# Altium PCB 4.2V_charge_module.PcbDoc
Units mm, origin at the board's own origin, x right, y up, seen from the top; angles counter-clockwise.
Board outline 45 x 50 mm, 2 copper layers (Top Layer, Bottom Layer); 41 components, 39 nets, 176 pads, 165 vias.
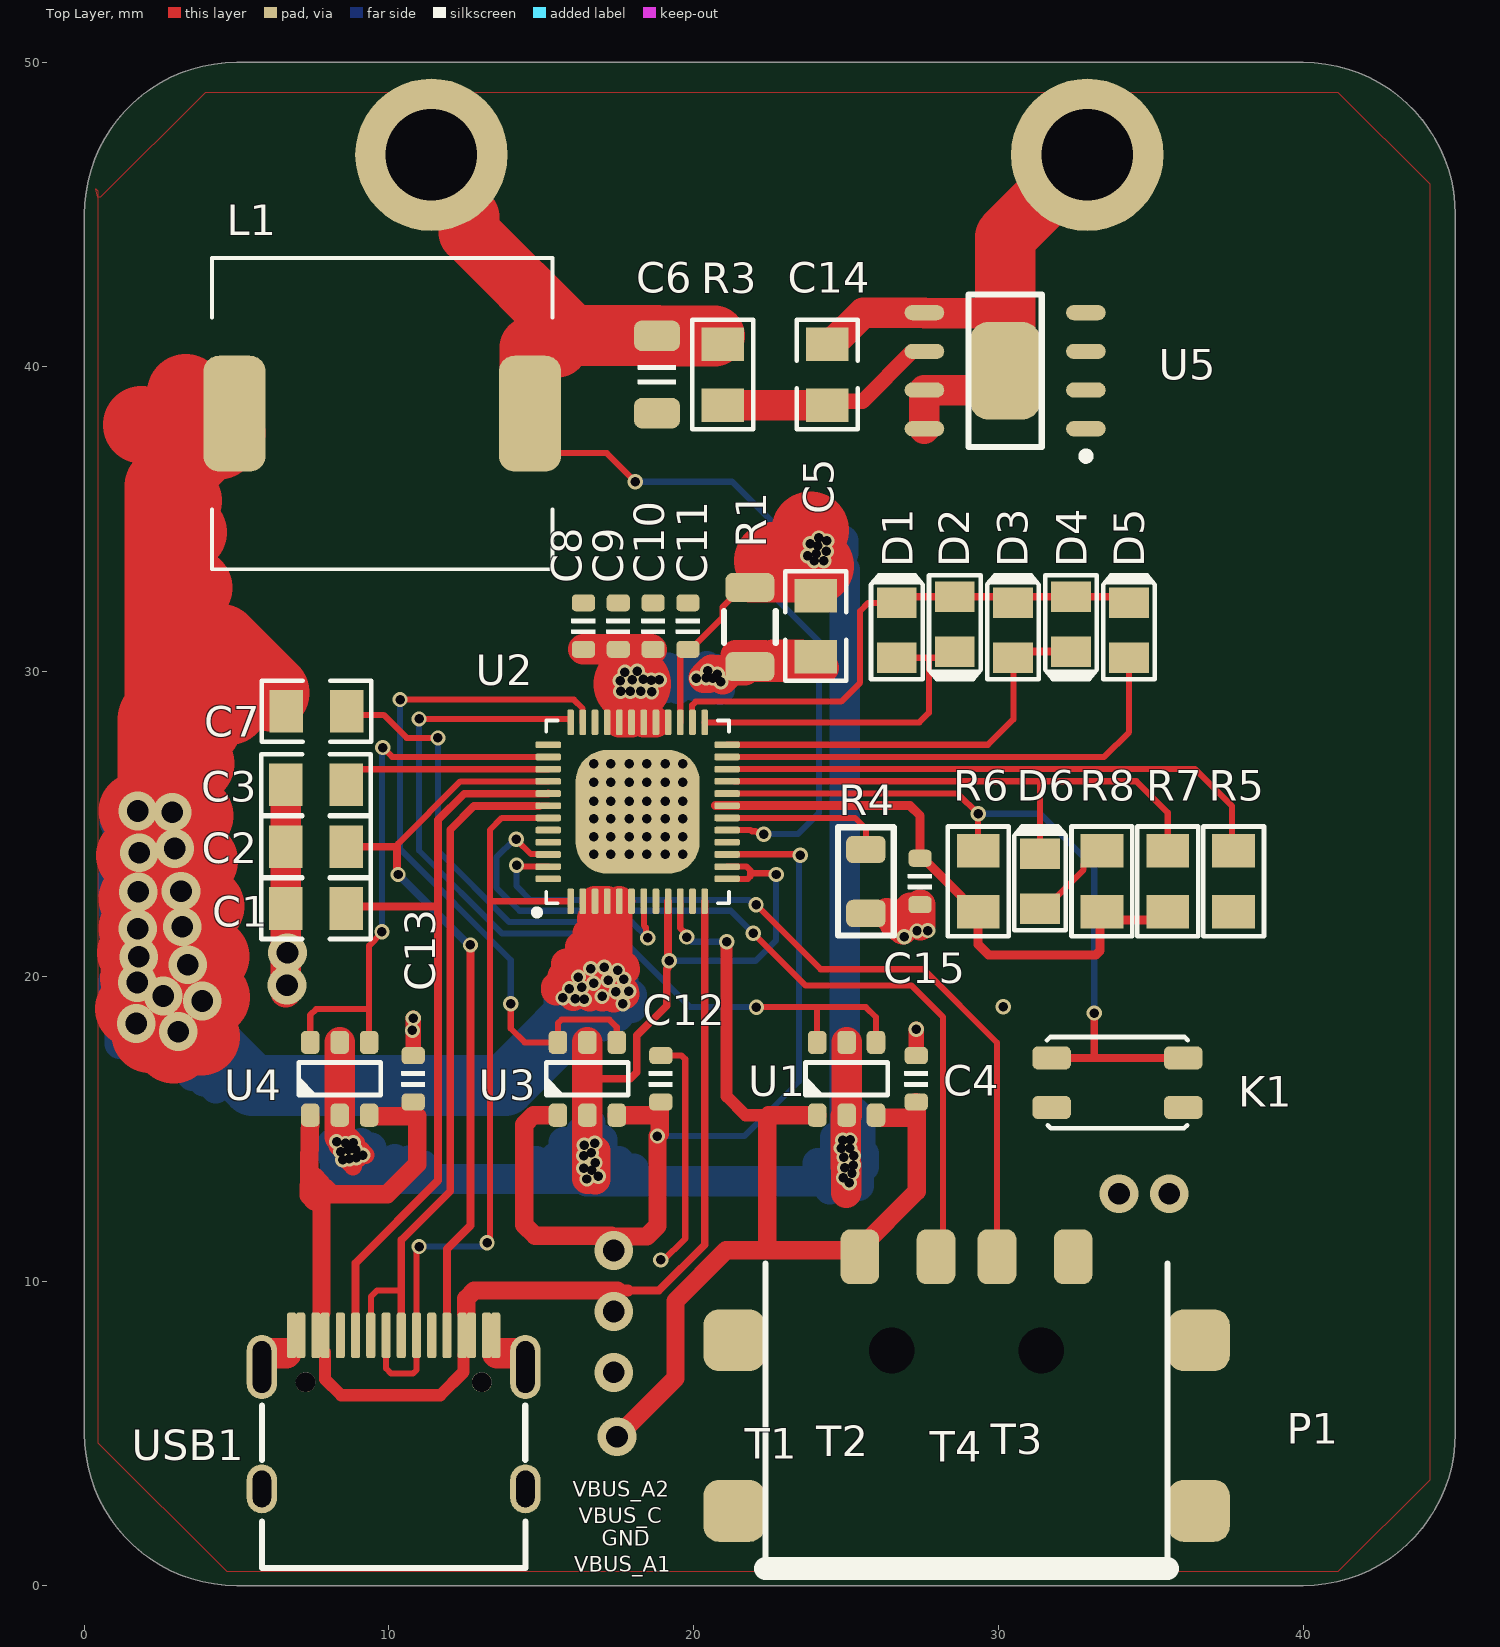
[diagram p0: Top Layer view]
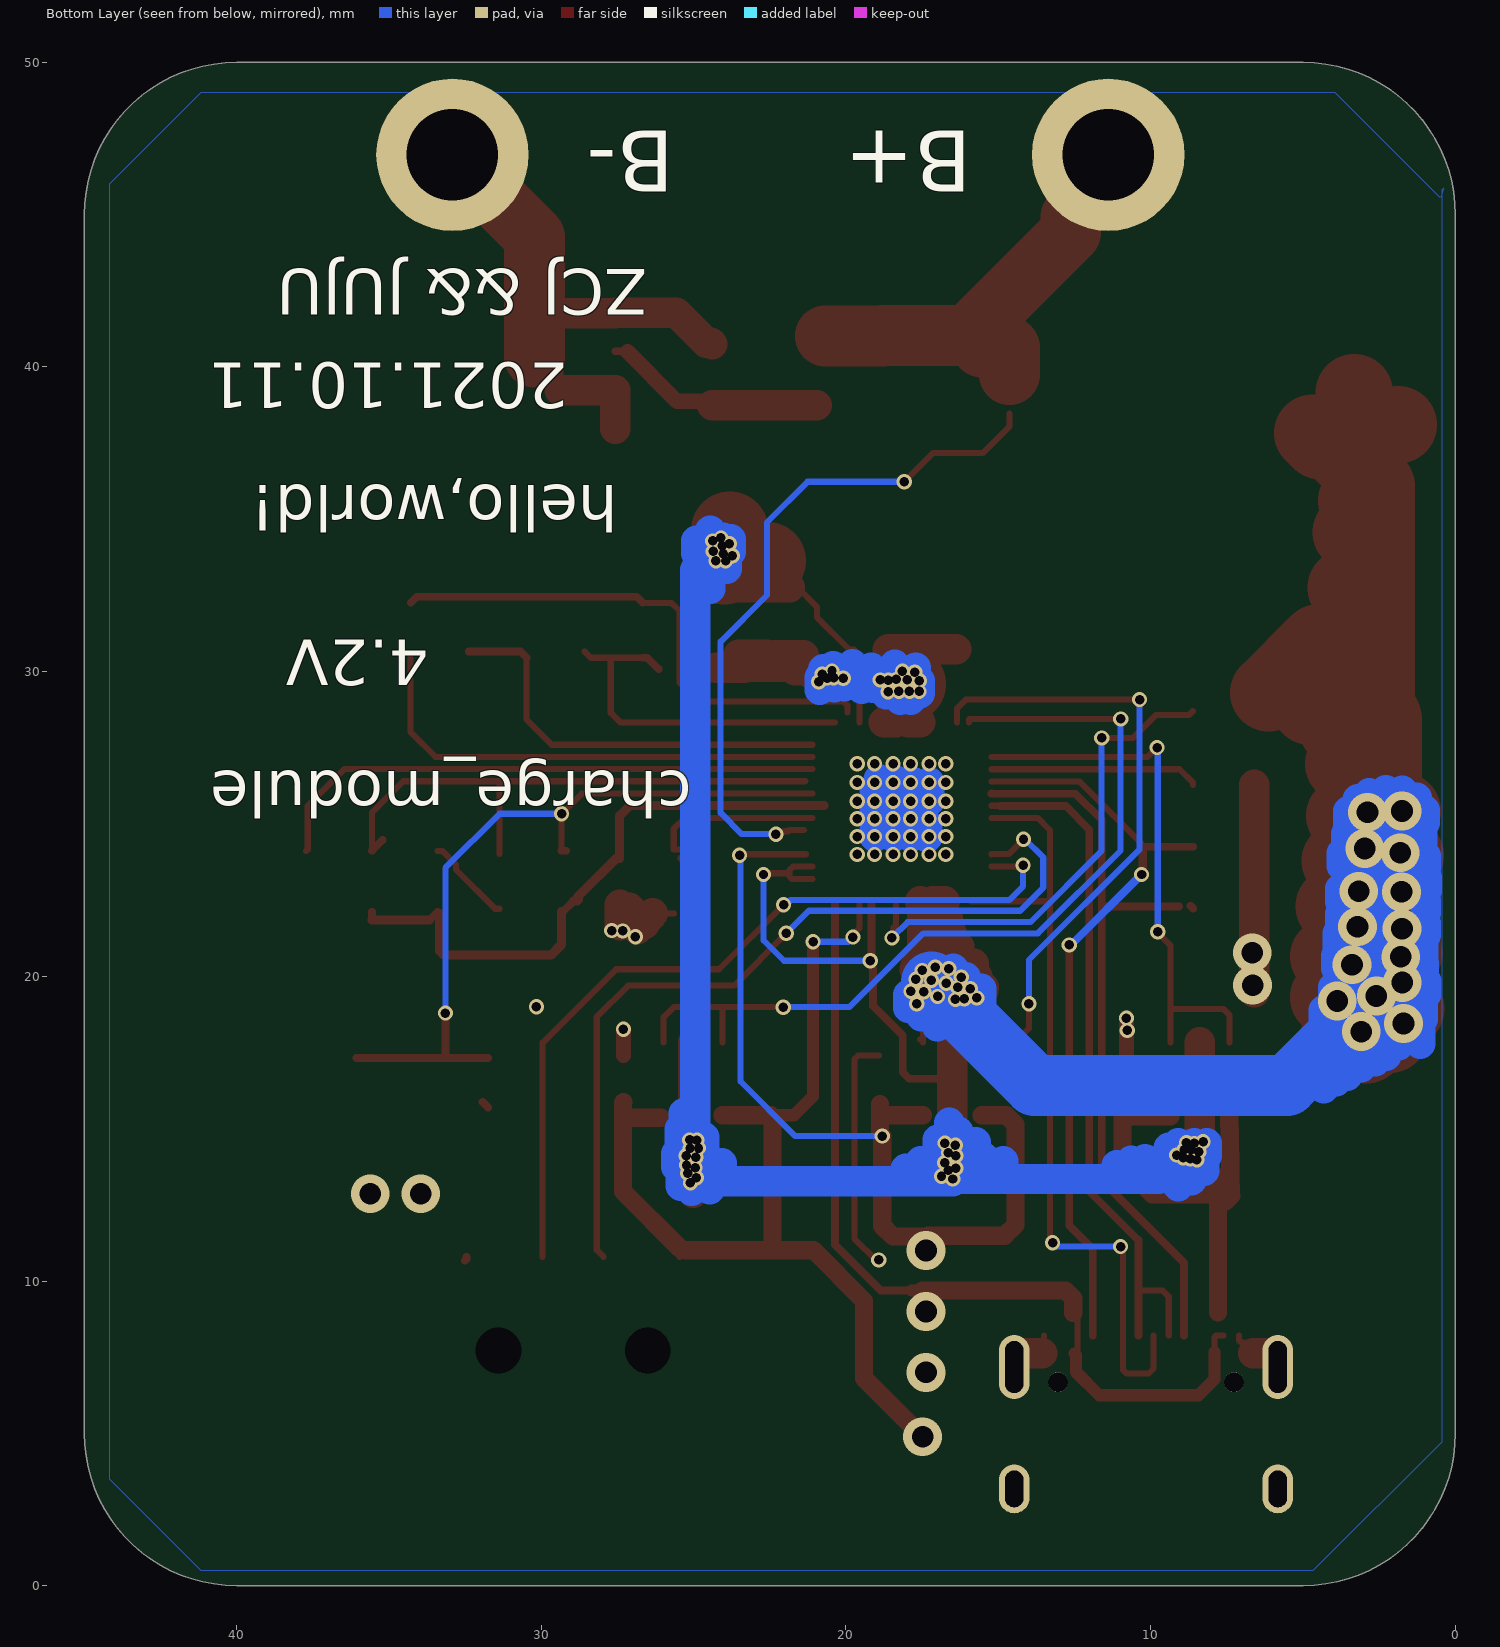
[diagram p1: Bottom Layer view, seen from below]
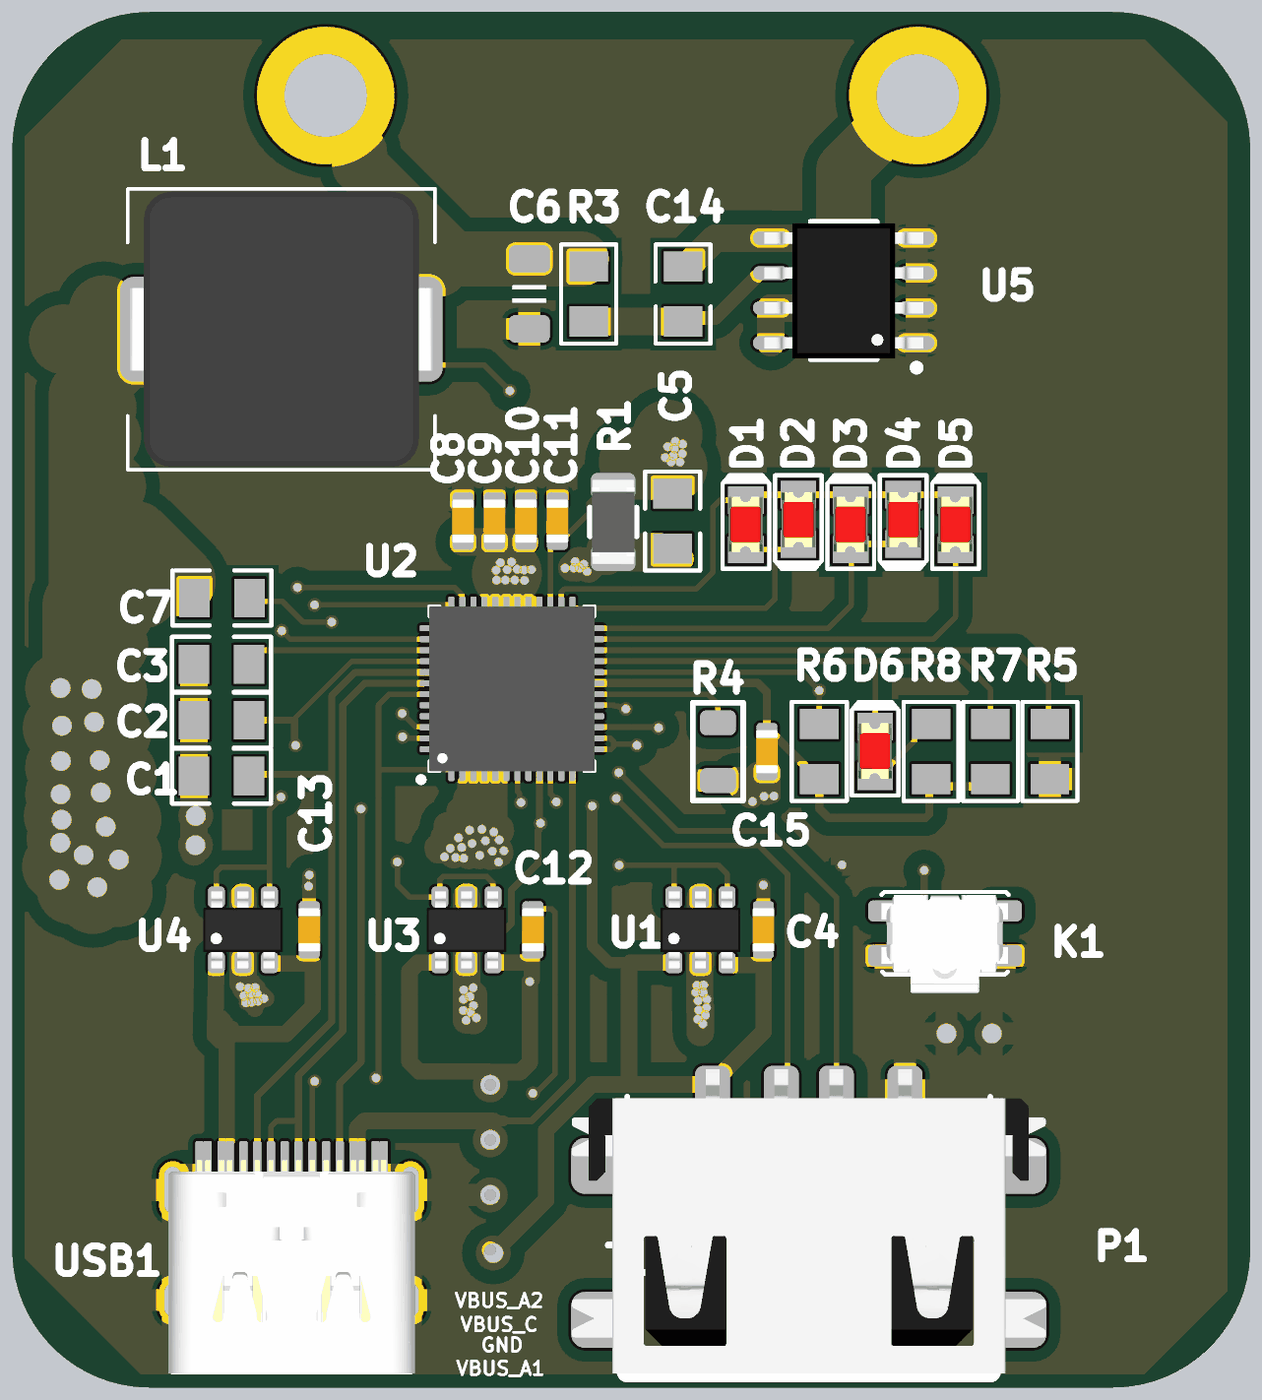
[diagram p2: 3D render of the assembled board from above, using the file's embedded part models]

## Layer stack, top to bottom
Top Solder: solder mask 0.0102, Solder Resist, Dk 3.5
Top Layer: signal copper 0.0356
Dielectric 1: dielectric 0.32, FR-4, Dk 4.8
Bottom Layer: signal copper 0.0356
Bottom Solder: solder mask 0.0102, Solder Resist, Dk 3.5

## Board outline
5,0 cw(c5,5) 0,5 0,45 cw(c5,45) 5,50 40,50 cw(c40,45) 45,45 45,5 cw(c40,5) 40,0

## Design rules (kind name [scope] priority, off if disabled: settings)
Clearance Clearance_POLY [All] p1: gap=0.15 ignorepadtopadclearanceinfootprint=FALSE except(0.5: Arc-Poly Track-Poly SMDPad-Poly THPad-Poly Via-Poly Fill-Poly Poly-Poly)
Clearance Clearance_1 [All] p2: gap=0.15 ignorepadtopadclearanceinfootprint=FALSE
PlaneClearance [All] p1: clearance=0.8
PolygonConnect [All] p1: connectstyle=Relief reliefconductorwidth=0.8 reliefentries=4 polygonreliefangle="90 Angle" airgapwidth=0.254
RoutingVias [All] p1: holewidth=0.711 width=1.27 viastyle="Through Hole" minholewidth=0.711 minwidth=1.27 maxholewidth=0.711 maxwidth=1.27
SolderMaskExpansion [All] p1: expansion=0.102 istentingtop=FALSE
Width [All] p1: maxlimit=0.254 minlimit=0.2 preferedwidth=0.2
29 further rules are at their usual default settings.

## Components (designator, comment, footprint, x,y, rotation, side; value= is the part's Value field where it differs from the comment)
C1 "300pF" 0805C 7.604,22.225 r0 top value=0.1u
C2 "300pF" 0805C 7.604,24.257 r0 top value=0.1u
C3 "300pF" 0805C 7.604,26.289 r0 top value=0.1u
C4 "10uF" 0603-CAP 27.305,16.637 r270 top value=0.1u
C5 "0.1uF" 0805C 24.003,31.496 r90 top value=0.1u
C6 "100uF/16V" 1206-CAP 18.796,39.754 r90 top value=0.1u
C7 "0.1uF" 0805C 7.62,28.702 r0 top value=0.1u
C8 "10uF" 0603-CAP 16.383,31.496 r270 top value=0.1u
C9 "10uF" 0603-CAP 17.526,31.496 r270 top value=0.1u
C10 "10uF" 0603-CAP 18.669,31.496 r270 top value=0.1u
C11 "10uF" 0603-CAP 19.812,31.496 r270 top value=0.1u
C12 "10uF" 0603-CAP 18.923,16.637 r270 top value=0.1u
C13 "10uF" 0603-CAP 10.795,16.637 r270 top value=0.1u
C14 "0.1uF" 0805C 24.384,39.751 r90 top value=0.1u
C15 "10uF" 0603-CAP 27.432,23.114 r90 top value=0.1u
D1 "color?" LED0805R 26.67,31.358 r90 top
D2 "color?" LED0805R 28.575,31.558 r270 top
D3 "color?" LED0805R 30.48,31.358 r90 top
D4 "color?" LED0805R 32.385,31.558 r270 top
D5 "color?" LED0805R 34.29,31.358 r90 top
D6 "color?" LED0805R 31.369,23.119 r90 top
K1 "TACT 4P" ButtonTACT_3.5*3.55_90 33.909,16.51 r180 top value=3.4x3.5
L1 "2.2uH" IND_1040 9.779,38.468 r180 top
P1 "USB-A" USB-Short 28.956,4.318 r270 top
R1 "5mR" 1206-RES 21.844,31.465 r90 top value=22R
R3 "1K" 0805R 20.955,39.751 r90 top value=22R
R4 "NTC" 0805-L 25.654,23.114 r90 top value=22R
R5 "20K" 0805R 37.719,23.119 r270 top value=22R
R6 "10K" 0805R 29.337,23.119 r270 top value=22R
R7 "10K" 0805R 35.56,23.119 r270 top value=22R
R8 "2K" 0805R 33.401,23.119 r270 top value=22R
T1 "测试点" TEST_PT#1 17.374,8.382 r0 top
T2 "测试点" TEST_PT#2 17.374,6.197 r0 top
T3 "测试点" TEST_PT#3 17.374,12.268 r0 top
T4 "测试点" TEST_PT#4 17.374,9.652 r0 top
U1 "UT8205A" SOT23-6 25.019,16.637 r90 top
U2 "SW6208" QFN-48_6x6 18.161,25.4 r90 top
U3 "UT8205A" SOT23-6 16.51,16.637 r90 top
U4 "UT8205A" SOT23-6 8.382,16.637 r90 top
U5 "XB8886A" SO-8-PAD 30.226,39.878 r180 top
USB1 "Type-C" Type-C-TOP 10.153,5.695 r270 top

## Footprints (in the part's own frame and the unit in brackets; to place one, negate y for a bottom-side part, rotate by r counter-clockwise, add the part's x,y. Pads: shape width x height; smd on the part's side, far side on the other; paste and mask are expansions set on the pad)
0603-CAP [mil]
  rrect50% 22x30 smd: 1(-30,0) 2(30,0)
  silkscreen extent -10,-15 10,15, body extent -31,-16 32,16, height 31
0805-L [mm]
  rrect50% 0.9x1.3 smd: 1(-1.05,0) 2(1.05,0)
  silkscreen extent -1.78,-0.91 1.78,0.91, body extent -1,-0.6 1,0.6, height 0.76
0805C [mm] "C"
  rect 1.1x1.4 smd: 1(-1,0) 2(1,0)
  silkscreen extent -1.8,-1 1.8,1, body extent -1.07,-0.7 1.08,0.7, height 1.1
0805R [mm] "R"
  rect 1.1x1.4 smd: 1(-1,0) 2(1,0)
  silkscreen extent -1.8,-1 1.8,1, body extent -1.08,-0.7 1.07,0.7, height 0.65
1206-CAP [mm]
  rrect50% 1x1.5 smd: 1(-1.27,0) 2(1.27,0)
  silkscreen extent -0.3,-0.61 0.3,0.61, body extent -1.5,-0.75 1.5,0.75, height 1.5
1206-RES [mm]
  rrect50% 0.956x1.61 smd paste+0 mask+0: 1(-1.301,0) 2(1.301,0)
  silkscreen extent -0.52,-0.85 0.52,0.85, body extent -1.55,-0.77 1.55,0.78, height 0.65
ButtonTACT_3.5*3.55_90 [mil]
  rrect50% 50x30 smd: 1(-85,32) 2(-85,-32) 3(85,32) 4(85,-32)
  silkscreen extent -91,-59 91,59, body extent -90,-55 91,85, height 56
IND_1040 [mm]
  rrect50% 2.032x3.81 smd: 1(-4.85,0) 2(4.85,0)
  silkscreen extent -5.59,-5.11 5.59,5.11, body extent -5.5,-5 5.5,5, height 3.7
LED0805R [mm]
  rect 1x1.3 smd: 1(-0.9,0) 2(0.9,0)
  silkscreen extent -1.6,-0.85 1.8,0.85, body extent -0.99,-0.62 1.03,0.64, height 1.1
QFN-48_6x6 [mm]
  rrect50% 0.84x0.22 smd: 1(-2.935,2.2) 2(-2.935,1.8) 3(-2.935,1.4) 4(-2.935,1) 5(-2.935,0.6) 6(-2.935,0.2) 7(-2.935,-0.2) 8(-2.935,-0.6) 9(-2.935,-1) 10(-2.935,-1.4) 11(-2.935,-1.8) 12(-2.935,-2.2) 25(2.935,-2.2) 26(2.935,-1.8) 27(2.935,-1.4) 28(2.935,-1) 29(2.935,-0.6) 30(2.935,-0.2) 31(2.935,0.2) 32(2.935,0.6) 33(2.935,1) 34(2.935,1.4) 35(2.935,1.8) 36(2.935,2.2)
  rrect50% 0.22x0.84 smd: 13(-2.2,-2.935) 14(-1.8,-2.935) 15(-1.4,-2.935) 16(-1,-2.935) 17(-0.6,-2.935) 18(-0.2,-2.935) 19(0.2,-2.935) 20(0.6,-2.935) 21(1,-2.935) 22(1.4,-2.935) 23(1.8,-2.935) 24(2.2,-2.935) 37(2.2,2.935) 38(1.8,2.935) 39(1.4,2.935) 40(1,2.935) 41(0.6,2.935) 42(0.2,2.935) 43(-0.2,2.935) 44(-0.6,2.935) 45(-1,2.935) 46(-1.4,2.935) 47(-1.8,2.935) 48(-2.2,2.935)
  rrect50% 4.064x4.064 smd paste-3: 49(0,0)
  silkscreen extent -3.4,-3 3,3.4, body extent -3,-3 3,3, height 0.9
SO-8-PAD [mm]
  oval 1.3x0.5 smd: 1(-2.65,1.905) 2(-2.65,0.635) 3(-2.65,-0.635) 4(-2.65,-1.905) 5(2.65,-1.905) 6(2.65,-0.635) 7(2.65,0.635) 8(2.65,1.905)
  rrect50% 2.3x3.2 smd: 9(0,0)
  silkscreen extent -2.78,-2.5 1.2,2.93, body extent -2.89,-2.44 2.89,2.46, height 1.45
SOT23-6 [mil]
  rrect50% 30x24 smd: 1(-47,38) 2(-47,0) 3(-47,-38) 4(47,-38) 5(47,0) 6(47,38)
  silkscreen extent -21,-53 21,53, body extent -55,-57 55,57, height 57
TEST_PT#1 [mil]
  rrect100% 16x16 smd: 0(0,-54.4)
TEST_PT#2 [mil]
  rrect100% 16x16 smd: 0(0,-47.14)
TEST_PT#3 [mil]
  rrect100% 16x16 smd: 0(0,-49.92)
TEST_PT#4 [mil]
  rrect100% 16x16 smd: 0(0,-25.67)
Type-C-TOP [mm]
  round 0.65 hole 0.65: 0(-0.98,2.89) 0(-0.98,-2.89)
  oval 1.6x1 hole 0.6 slot 1.2 at 0 deg: 1(2.52,4.325) 2(2.52,-4.325)
  oval 2.1x1 hole 0.6 slot 1.7 at 0 deg: 3(-1.48,-4.325) 4(-1.48,4.325)
  rrect50% 1.5x0.3 smd: A1(-2.52,-3.35) A4(-2.52,-2.55) A5(-2.52,-1.25) A6(-2.52,-0.25) A7(-2.52,0.25) A8(-2.52,1.25) A9(-2.52,2.55) A12(-2.52,3.35) B1(-2.52,3.05) B4(-2.52,2.25) B5(-2.52,1.75) B6(-2.52,0.75) B7(-2.52,-0.75) B8(-2.52,-1.75) B9(-2.52,-2.25) B12(-2.52,-3.05)
  silkscreen extent -0.22,-4.33 5.12,4.33, body extent -2.57,-4.48 5.18,4.48, height 3.26
USB-Short [mm]
  rrect50% 2.032x2.032 smd: 0(-3.738,7.625) 0(-3.738,-7.625) 0(1.862,7.625) 0(1.862,-7.625)
  rrect50% 1.8x1.27 smd: 1(-6.476,-3.5) 2(-6.476,-1) 3(-6.476,1) 4(-6.476,3.5)
  round 0.6 hole 1.5 unplated: MH1(-3.4,2.45) MH2(-3.4,-2.45)
  silkscreen extent -6.25,-6.6 3.75,6.6, body extent -7.25,-8.62 3.81,8.62, height 6.4

## Part data
C1 C2 C3 C5 C7 C14: library part 电容-0402, "Capacitor"
C4 C8 C9 C10 C11 C12 C13 C15: library part 电容-0603, "Capacitor"
C6: library part 电容-1206, "Capacitor"
D1 D2 D3 D4 D5 D6: library part LED_0402, "LED", Type=0402
K1: library part ButtonTACT, "Button", Type="TACT 4P"
L1: library part 电感-1040, "Fixed Inductors 4.7uH 30% SMD 1240", Package=None, Availability=Bad, Check_prices=https://www.snapeda.com/parts/SRR1240-4R7Y/Bourns/view-part/1646614/?ref=eda, MF=Bourns, MP=SRR1240-4R7Y, Price=None, SnapEDA_Link=https://www.snapeda.com/parts/SRR1240-4R7Y/Bourns/view-part/1646614/?ref=snap
R1: library part 电阻-1206, "Resistor"
R3 R5 R6 R7 R8: library part 电阻-0402, "Resistor"
R4: library part 电阻-0805, "Resistor"
U2: "充电宝芯片"
U5: Package="SOIC-8 Texas Instruments", Availability=Unavailable, MF="Texas Instruments", MP=NE5532D, Price=None, SnapEDA_Link=https://www.snapeda.com/parts/NE5532D/Texas%20Instruments/view-part/4299479/?ref=snap
USB1: library part USB-Type-C-TOP

## Free pads (board coordinates)
  round 5 hole 3: 2(11.392,46.965) 2(32.918,46.965)

## Via types
v1: diameter 0.5, hole 0.311, Top Layer to Bottom Layer, tented both sides, 142 vias
v2: diameter 1.27, hole 0.711, Top Layer to Bottom Layer, tented both sides, 23 vias

## Nets (pads, with @x,y where several pads share a name; then routed paths per layer and width w, separated by ;. In a path a pad name is that pad's centre, name@x,y a point inside that pad or via, vN(x,y) a via of type N, cw(c..) or ccw(c..) an arc to the next point about the centre after c; other vN are vias at no path point)
B+: C6.2 L1.1 pad.2@11.392,46.965 R3.2 U2.17 | length 40
  Top Layer w0.2: L1.1 14.629,38.056 15.514,37.171 17.147,37.171 v1(18.085,36.233) ; U2.17@21.387,24.803 21.869,24.803 21.91,24.763 22.035,24.763 22.075,24.723 22.244,24.723 v1(22.302,24.665)
  Top Layer w0.254: L1.1@13.763,39.9 13.911,39.751 13.998,39.751 L1.1@14.629,39.751 ; L1.1@13.951,40.265 14.629,40.6 ; R3.2@20.682,41.024 R3.2
  Top Layer w2: pad.2@11.392,46.965 11.392,46.153 12.624,44.921 12.624,44.419 16.015,41.028 ; L1.1@14.629,39.751 14.629,40.6 14.629,40.64 14.645,40.656 15.534,40.656 15.906,41.028 16.015,41.028 ; R3.2@20.682,41.024 C6.2 18.793,41.028 16.015,41.028
  Bottom Layer w0.2: v1(18.085,36.233) 21.26,36.233 22.593,34.9 22.593,32.512 24.117,30.988 24.117,25.362 23.421,24.665 v1(22.302,24.665)
B-: C14.2 pad.2@32.918,46.965 U5.5 U5.7 U5.8 U5.9 | length 19.2
  Top Layer w0.254: U5.5 U5.5@27.589,41.77 ; U5.9@29.398,39.242 29.398,39.838 29.439,39.878 U5.9 U5.9@30.226,40.328 ; 29.807,41.77 U5.9@30.226,41.351
  Top Layer w1: C14.2 24.434,40.801 24.584,40.801 25.566,41.783 U5.5 ; U5.8 U5.7 27.577,39.242 U5.9@29.398,39.242 ; U5.5@27.589,41.77 29.807,41.77
  Top Layer w2: U5.9@30.226,40.328 30.226,41.351 30.226,44.272 pad.2@32.918,46.965
BST: C7.2 U2.7 | length 16.4
  Top Layer w0.2: C7.2 8.739,28.583 9.822,28.583 10.579,27.826 v1(11.608,27.826) ; U2.7@18.364,22.465 18.364,21.666 18.434,21.596 18.434,21.319 v1(18.492,21.262)
  Bottom Layer w0.2: v1(11.608,27.826) 11.608,24.117 13.945,21.78 17.973,21.78 v1(18.492,21.262)
CC1: C1.2 U2.41 USB1.A5 | length 24.7
  Top Layer w0.254: C1.2 C1.2@8.693,22.314 ; USB1.A5 8.903,10.592 11.608,13.297 11.608,22.288 ; C1.2@9.068,22.288 11.608,22.288 ; U2.41 15.223,25.997 12.471,25.997 11.608,25.133 11.608,22.288
CC2: C2.2 U2.40 USB1.B5 | length 25.8
  Top Layer w0.2: v1(10.3,23.343) 10.3,23.504 10.3,24.358 12.341,26.4 U2.40
  Top Layer w0.254: C2.2 10.253,24.257 10.253,23.39 v1(10.3,23.343) ; USB1.B5 11.903,11.052 12.675,11.824 v1(12.675,21.031)
  Bottom Layer w0.254: v1(10.3,23.343) 12.611,21.031 v1(12.675,21.031)
CCL/WLED: C3.2 U2.39 | length 6.9
  Top Layer w0.2: C3.2 8.604,26.347 9.054,26.797 U2.39@15.226,26.797
DATA: U2.8
DMA1: P1.2 U2.46 | length 27.5
  Top Layer w0.2: v1@14.199,24.473 14.661,24.01 15.216,24.01 U2.46 ; v1(21.958,21.412) 23.673,19.698 27.153,19.698 28.181,18.669 28.181,11.019 P1.2
  Bottom Layer w0.2: v1(14.174,24.5) 14.124,24.5 13.525,23.901 13.525,22.911 14.283,22.154 21.217,22.154 v1(21.958,21.412)
DMA2: U2.48
DMB: U2.44
DMC: U2.42 USB1.A7 USB1.B7 | length 23.2
  Top Layer w0.2: USB1.B7 9.407,8.219 9.407,9.483 9.614,9.69 10.403,9.69 ; U2.42@14.933,25.6 U2.42
  Top Layer w0.254: USB1.A7 10.403,9.69 10.403,11.343 12.012,12.952 12.012,24.813 12.791,25.593 U2.42@14.933,25.593
DPA1: P1.3 U2.47 | length 26.7
  Top Layer w0.2: v1@14.148,23.597 14.151,23.6 U2.47 ; v1(22.047,22.352) 24.168,20.231 27.546,20.231 29.956,17.821 P1.3
  Bottom Layer w0.2: v1(14.186,23.649) 14.186,22.961 14.644,22.504 21.814,22.504 21.966,22.352 v1(22.047,22.352)
DPB: U2.45
DPC: U2.1 U2.43 USB1.A6 USB1.B6 | length 27
  Top Layer w0.2: USB1.A6 9.903,7.128 10.071,6.96 10.786,6.96 10.903,7.077 10.903,11.043 v1@11.074,11.214 ; v1(13.221,11.252) 13.31,11.341 13.31,22.465 ; U2.43 13.707,25.2 13.31,24.803 13.31,22.465 ; U2.1@15.897,22.465 13.31,22.465
  Bottom Layer w0.2: v1(10.989,11.128) 13.097,11.128 v1(13.221,11.252)
FLED/BSET/IDA2: D6.2 R7.1 U2.21 | length 18.8
  Top Layer w0.2: U2.21@21.336,26.416 21.349,26.403 31.331,26.403 ; D6.2 31.369,26.365 31.331,26.403 ; R7.1 35.56,25.375 34.531,26.403 31.331,26.403
  Top Layer w0.254: R7.1@35.201,24.478 R7.1
GATE_A1: U1.4 U1.6 U2.36 | length 28.6
  Top Layer w0.2: v1(10.986,28.448) 15.938,28.448 15.961,28.425 U2.36 ; v1@22.125,18.988 24.092,18.988 ; U1.6 24.054,18.95 24.092,18.988 ; U1.4 25.984,18.656 25.652,18.988 24.092,18.988
  Bottom Layer w0.2: v1(10.986,28.448) 10.986,24.13 13.703,21.412 17.462,21.412 19.886,18.988 v1(22.06,18.988)
GATE_A2: U2.35 U3.4 U3.6 | length 23.9
  Top Layer w0.2: v1(10.363,29.083) 16.064,29.083 16.351,28.796 16.351,28.345 U2.35 ; v1(13.995,19.101) 13.995,18.288 14.453,17.831 U3.6 15.545,18.464 15.662,18.581 17.23,18.581 17.475,18.336 U3.4@17.475,17.935 ; U3.4 U3.4@17.475,17.935 ; U3.4@17.577,17.932 17.478,17.932 U3.4@17.475,17.935
  Bottom Layer w0.2: v1(10.363,29.083) 10.363,24.168 13.995,20.536 v1(13.995,19.101)
GATE_B: U2.37
GATE_C: U2.38 U4.4 U4.6 | length 18.3
  Top Layer w0.2: U4.6 7.417,18.732 7.607,18.923 9.347,18.923 ; U4.4 9.347,18.923 ; v1(9.766,21.463) 9.766,21.425 9.347,21.006 9.347,18.923 ; v1(9.792,27.508) 10.1,27.2 12.945,27.2 U2.38
  Bottom Layer w0.2: v1(9.766,21.463) 9.766,27.483 v1(9.792,27.508)
GATEL: U2.34
GND: C1.1 C2.1 C3.1 C4.1 C6.1 C8.1 C9.1 C10.1 C11.1 C12.1 C13.1 C15.1 K1.1 K1.3 P1.4 R4.1 R5.2 T1.0 U2.49 U5.1 U5.2 U5.3 U5.4 USB1.1 USB1.2 USB1.3 USB1.4 USB1.A1 USB1.A12 USB1.B1 USB1.B12 | length 30
  Top Layer w0.2: USB1.3 5.828,7.262 USB1.3@6.198,7.631 ; 6.628,7.631 6.998,8.001 7.053,8.001 7.103,8.051 USB1.B12 ; v1(10.795,18.631) v1@10.82,18.656 ; USB1.A12 13.503,7.682 USB1.A12@13.553,7.632 ; USB1.4@14.187,7.632 USB1.4@14.478,7.341 ; C12.1 19.606,17.399 19.723,17.282 19.723,11.392 v1@18.974,10.643 ; R4.1 26.337,22.064 ; 26.856,21.546 27.273,21.546 v1(27.33,21.488)
  Top Layer w0.254: USB1.4@14.133,7.852 14.478,7.507 USB1.4@14.478,7.341 ; K1.3 K1.3@31.928,15.875 ; P1.4 32.456,10.724 P1.4@32.512,10.668
  Top Layer w0.5: C13.1 v1(10.795,18.631) ; C4.1 v1(27.305,18.263)
  Top Layer w1: USB1.3@6.198,7.631 6.628,7.631 ; v2@6.604,19.469 C1.1 C2.1 C3.1 ; USB1.A12@13.553,7.632 USB1.4@14.187,7.632 ; 26.337,22.064 26.856,21.546 ; 26.597,21.73 C15.1@27.115,22.248 ; v1@27.432,21.671 C15.1
  Bottom Layer w0.2: v2(17.374,7) v2@17.468,7.094
  Bottom Layer w1: v1(17.272,25.743) v1(17.272,26.365) ; v1@17.338,24.566 v1@17.338,24.983 ; 17.488,24.714 v1@17.488,25.131 ; v1@17.831,25.971 v1@17.831,26.389 ; v1(17.882,24.587) v1@17.882,25.004 ; 18.199,24.905 18.199,25.322 ; 18.351,26.01 v1@18.351,26.427 ; v1(18.453,24.587) v1@18.453,25.004 ; 18.923,26.048 v1@18.923,26.465 ; v1(19.063,24.587) v1@19.063,25.004 ; v1(19.063,25.171) v1@19.063,25.589 ; v1(19.063,25.743) v1@19.063,26.16
  other v1: 18.923,10.693 10.77,18.224 30.162,18.999 26.911,21.298 27.686,21.501 16.726,24.003 17.272,24.003 17.882,24.003 18.453,24.003 19.063,24.003 19.634,24.003 16.726,24.587 17.272,24.587 19.634,24.587 16.726,25.171 17.272,25.171 17.882,25.171 18.453,25.171 19.634,25.171 16.726,25.743 17.882,25.743 18.453,25.743 19.634,25.743 16.726,26.365 17.882,26.365 18.453,26.365 19.063,26.365 19.634,26.365 16.726,26.975 17.272,26.975 17.882,26.975 18.453,26.975 19.063,26.975 19.634,26.975
  other v2: 33.96,12.865 35.611,12.865 6.655,19.71 6.667,20.777
KEY/GSET/IDA1: K1.2 K1.4 R6.1 U2.20 | length 25
  Top Layer w0.2: U2.20 27.915,26 28.674,26 v1(29.337,25.336) R6.1
  Top Layer w0.254: R6.1@29.187,24.119 R6.1 ; K1.4 33.147,17.323 ; v1(33.147,18.796) 33.147,17.323 ; K1.2 33.147,17.323
  Bottom Layer w0.2: v1(29.337,25.336) 31.369,25.336 33.147,23.558 v1(33.147,18.796)
LED1/SCL: D1.2 D2.1 D3.2 D4.1 D5.2 U2.26 | length 17.5
  Top Layer w0.2: U2.26@19.952,28.664 19.952,28.902 20.069,29.019 24.841,29.019 25.463,29.642 25.463,31.991 25.73,32.258 D1.2
  Top Layer w0.254: D1.2 26.87,32.458 D2.1 30.48,32.458 D4.1 34.09,32.458 D5.2
LED2/SDA: D1.1 D2.2 U2.25 | length 12
  Top Layer w0.2: U2.25 27.408,28.335 27.722,28.65 27.722,30.458 ; D1.1 27.722,30.458 ; D2.2 28.375,30.458 27.722,30.458
  Top Layer w0.254: D1.1@26.147,30.085 26.52,30.458 D1.1
LED3/IRQ: D3.1 D4.2 U2.24 | length 13.8
  Top Layer w0.2: U2.24 29.657,27.6 30.493,28.435 30.493,30.445 D3.1
  Top Layer w0.254: D3.1 30.68,30.658 D4.2
LED4/I2C: D5.1 U2.23 | length 16
  Top Layer w0.2: U2.23 33.474,27.2 34.29,28.016 D5.1
LED5/CSET: R5.1 U2.22 | length 18.6
  Top Layer w0.2: U2.22 36.462,26.8 37.668,25.593 37.668,24.169 R5.1
NetC14_1: C14.1 R3.1 U5.6 | length 7.4
  Top Layer w0.254: U5.6@27.171,40.503 27.18,40.513 U5.6
  Top Layer w0.5: C14.1 24.507,38.874 25.541,38.874 U5.6@27.171,40.503
  Top Layer w1: R3.1 C14.1
NetD6_1: D6.1 R8.1 | length 2.9
  Top Layer w0.2: D6.1 31.519,22.219 32.801,23.501 32.801,23.669 33.251,24.119 R8.1
NetR4_2: R4.2 U2.18 | length 5.8
  Top Layer w0.2: U2.18 21.099,25.197 25.298,25.197 25.654,24.841 R4.2 R4.2@25.454,24.164
  Top Layer w0.254: R4.2@25.166,23.876 R4.2@25.4,23.876
SW: C7.1 L1.2 U2.2 U2.3 U2.4 U2.5 U2.6 | length 72.1
  Top Layer w0.254: v2(2.591,19.355) v2@2.896,19.05 ; 2.591,28.41 2.591,28.99 ; 4.475,30.295 4.475,30.958 ; C7.1@6.126,29.307 6.158,29.275 6.197,29.275 6.62,28.852 C7.1 ; U2.2@16.452,22.465 U2.3 ; U2.4 U2.5 U2.6
  Top Layer w1: 15.482,19.638 15.494,19.545 ; 15.698,20.006 15.71,19.914 ; 15.812,20.412 15.824,20.32 ; v1@16.041,19.46 v1@16.053,19.367 ; 16.244,20.387 16.256,20.295 ; 16.282,20.971 16.294,20.879 ; 16.524,21.416 16.535,21.323 ; 16.574,19.435 v1@16.586,19.342 ; U2.3 U2.4 ; 16.916,22.225 16.825,22.106 16.666,21.901 16.929,19.839 16.981,19.435 v1(16.993,19.342) ; v1@17.362,19.409 v1@17.374,19.317 ; v1@17.498,19.494 U2.5@17.498,22.274 ; U2.5 U2.5@17.57,22.456 ; v1@17.705,19.511 v1@17.716,19.418 ; 17.73,20.311 v1@17.742,20.218
  Top Layer w2.54: 2.591,28.99 2.591,36.091 4.079,37.579 4.421,37.579 L1.2@4.675,37.833 ; 4.475,30.958 C7.1@6.126,29.307
  Top Layer w3: v2(2.591,19.355) 2.591,28.41 4.475,30.295
  Bottom Layer w1: 0.94,22.811 0.94,23.228 ; 0.953,19.42 0.953,19.837 ; 0.975,21.349 0.975,21.766 ; 0.975,22.063 0.975,22.48 ; 0.978,23.535 0.978,23.952 ; 1.004,25.034 1.004,25.451 ; 1.029,20.017 1.029,20.434 ; 1.055,20.601 1.055,21.018 ; 1.067,18.595 1.067,19.012 ; 1.093,24.297 1.093,24.714 ; 1.156,17.782 v2@1.156,18.199 ; v2@1.267,25.439 1.267,25.857 ; 1.423,19.217 v2@1.423,19.634 ; v2@1.74,25.669 1.74,26.086 ; 1.855,17.731 v2@1.855,18.148 ; v2@1.855,23.218 v2@1.855,23.635 ; v2@1.982,24.615 v2@1.982,25.032 ; 2.261,17.401 2.261,17.818 ; v2@2.287,25.694 2.287,26.111 ; v2@2.312,21.782 2.312,22.2 ; 2.371,23.394 v2@2.371,23.811 ; 2.388,20.297 v2@2.388,20.714 ; 2.528,22.417 2.528,22.835 ; v2@2.549,24.563 v2@2.549,24.98 ; 2.629,17.21 2.629,17.628 ; 2.807,20.678 2.807,21.095 ; v2@2.825,25.586 v2@2.825,26.003 ; v2@3.074,23.04 3.074,23.457 ; 3.087,17.02 3.087,17.437 ; v2@3.201,25.402 v2@3.201,25.819 ; 3.518,24.996 3.518,25.413 ; 3.544,16.741 3.544,17.158 ; v2@3.582,24.259 3.582,24.676 ; 3.722,23.624 3.722,24.041 ; 3.772,22.456 v2@3.772,22.873 ; v2@3.783,21.641 3.783,22.058 ; 3.864,20.992 3.864,21.409 ; 3.912,16.563 3.912,16.98 ; v2@3.912,20.258 v2@3.912,20.676 ; v2@4.01,19.223 v2@4.01,19.64 ; 4.319,16.334 4.319,16.751 ; 4.319,18.476 v2@4.319,18.893 ; v1@15.563,19.179 15.563,19.596 ; v1@16.071,19.56 v1@16.071,19.977 ; v1@16.478,19.84 v1@16.478,20.257 ; 16.998,18.354 16.998,18.771 ; v1@17.196,19.809 v1(17.196,19.873) ; 17.532,18.684 v1@17.532,19.101 ; 17.963,18.976 v1@17.963,19.393
  Bottom Layer w2: v2(2.591,19.355) 5.524,16.421 13.808,16.421 v1@17.196,19.809
  other v1: 17.678,19.101 16.116,19.266 16.408,19.241 15.71,19.291 17.45,19.494 17.869,19.507 15.921,19.596 16.332,19.634 16.713,19.774 17.704,19.901 16.218,19.977 17.501,20.193 16.624,20.256 17.069,20.295
  other v2: 3.086,18.186 1.702,18.453 3.873,19.19 1.74,19.799 3.391,20.383 1.791,20.637 1.753,21.565 3.213,21.628 1.765,22.771 3.175,22.796 1.803,24.054 2.972,24.194 2.883,25.387 1.753,25.425
VBUS_A1: C4.2 P1.1 U1.1 U1.3 U2.10 | length 34.4
  Top Layer w0.2: U2.10 19.561,21.582 19.718,21.425 19.718,21.287 v1(19.774,21.287) ; P1.1@25.239,11.011 P1.1@25.315,10.935 ; P1.1 P1.1@25.315,10.935 ; P1.1@25.456,11.075 P1.1@25.315,10.935
  Top Layer w0.254: U1.3 U1.3@26.073,15.354
  Top Layer w0.4: v1(21.083,21.135) 21.083,16.065 21.704,15.443 22.466,15.443 22.415,15.392
  Top Layer w0.6: v2(17.486,4.888) 19.406,6.807 19.406,9.347 21.069,11.011 22.415,11.011 ; 22.415,15.392 22.415,11.011 ; 22.466,15.443 U1.1 ; P1.1@25.239,11.011 22.415,11.011 ; P1.1@25.456,11.075 27.318,12.937 27.318,15.354 ; U1.3@26.073,15.354 27.318,15.354 ; C4.2 27.318,15.862 27.318,15.354
  Bottom Layer w0.2: v1@19.924,21.135 v1(21.083,21.135)
VBUS_A2: C12.2 T3.0 U2.15 U3.1 U3.3 | length 30
  Top Layer w0.2: 18.759,15.443 18.885,15.317 ; U2.15@21.311,24.007 23.466,24.007 v1(23.495,23.978)
  Top Layer w0.254: v1(18.811,14.756) v1@18.885,14.83 ; 18.885,15.317 18.885,15.443 ; C12.2@18.885,15.805 18.815,15.875 C12.2
  Top Layer w0.6: U3.1 14.745,15.443 14.44,15.139 14.44,11.839 14.792,11.487 v2@17.304,11.487 ; T3.0@17.304,11.07 v2(17.374,11) ; v2@17.304,11.462 18.459,11.462 18.811,11.813 v1(18.811,14.756) ; U3.3 18.759,15.443 ; v1@18.885,14.83 18.885,15.317 ; 18.885,15.443 C12.2@18.885,15.805
  Bottom Layer w0.2: v1(18.811,14.756) 21.664,14.756 23.457,16.548 v1@23.457,23.99
VBUS_B: U2.11
VBUS_C: C13.2 T4.0 U2.12 U4.1 U4.3 USB1.A4 USB1.A9 USB1.B4 USB1.B9 | length 43.6
  Top Layer w0.2: USB1.A4 7.853,8.215 7.903,8.165 USB1.B9@7.903,7.765 ; USB1.B4@12.497,7.62 12.453,7.62 12.403,7.67 USB1.B4 12.403,8.815 12.537,8.949
  Top Layer w0.254: v2(17.374,9) T4.0@17.403,9.029 ; 17.843,9.69 18.86,9.69 20.361,11.192 U2.12
  Top Layer w0.4: USB1.B9@7.903,7.665 7.903,6.778 8.433,6.248 11.684,6.248 12.447,7.012 12.447,7.571 USB1.B4@12.497,7.62 ; C13.2@10.614,15.694 10.614,15.796 10.693,15.875 C13.2 ; T4.0@17.403,9.029 v2@17.403,9.529 ; 17.488,9.69 17.843,9.69
  Top Layer w0.6: 7.358,12.809 7.548,12.609 ; 7.366,12.941 7.376,13.448 7.384,13.847 U4.1 ; 7.548,13.444 7.739,13.244 ; 7.788,8.974 7.788,12.992 ; 7.941,13.047 8.131,12.847 9.938,12.847 10.923,13.831 10.923,15.405 ; U4.3 9.347,15.41 9.352,15.405 10.63,15.405 10.795,15.57 ; 12.537,8.949 12.537,9.429 12.799,9.69 17.488,9.69
VBUS_L: U2.16
VCC: C15.2 R6.2 R7.2 R8.2 U2.19 | length 20.1
  Top Layer w0.2: R8.2@33.337,22.055 R8.2
  Top Layer w0.254: R6.2@28.939,22.471 29.291,22.119 R6.2 ; R8.2 R8.2@33.676,21.844 ; R7.2@35.56,21.844 R7.2
  Top Layer w0.3: U2.19@20.726,25.603 21.096,25.603 27.102,25.603 27.432,25.273 C15.2 27.534,23.876 28.787,22.623 28.787,22.519 28.835,22.471 R6.2@28.939,22.471 ; R6.2 29.337,21.044 29.68,20.701 33.198,20.701 33.337,20.841 R8.2@33.337,22.055 ; R8.2@33.676,21.844 R7.2@35.56,21.844
VOUT: C5.1 C8.2 C9.2 C10.2 R1.1 U2.28 U2.29 U2.30 U2.31 U2.32 U2.33 | length 22.8
  Top Layer w0.2: v1(17.99,29.73) v1@17.996,29.736 ; v1@17.996,30.142 18.388,30.533 18.582,30.727 C10.2@18.622,30.727 ; v1(20.409,29.794) v1@20.49,29.794 ; R1.1@21.674,30.043 21.795,30.164 R1.1
  Top Layer w0.254: U2.31 U2.30 ; v1@17.961,29.604 v1@18.097,29.741 ; C10.2@18.622,30.727 18.629,30.734 C10.2 ; U2.29 19.05,28.335 ; C5.1@23.671,30.164 C5.1
  Top Layer w1: C8.2 C9.2 18.615,30.734 C10.2@18.622,30.727 ; U2.32 U2.31 v1@17.961,29.604 ; v1@17.996,29.736 v1@17.996,30.142 ; U2.30 U2.29 ; v1@20.338,29.807 v1@20.587,30.056 ; v1@20.49,29.794 20.739,30.043 R1.1@21.674,30.043 ; v1@20.947,29.756 R1.1@21.196,30.005 ; R1.1@21.387,30.539 R1.1@22.322,30.539 ; R1.1 C5.1@23.671,30.164 ; 22.593,30.564 C5.1@23.528,30.564 ; C5.1@23.343,30.132 C5.1@24.277,30.132
  Bottom Layer w0.254: v1@20.562,29.73 v1(20.621,29.789)
  Bottom Layer w1: v1@17.582,29.283 v1@17.582,29.7 ; v1@17.704,29.72 v1@17.704,30.137 ; 17.882,29.085 v1@17.882,29.502 ; v1(17.99,29.73) v1@20.562,29.73 ; 18.225,29.085 v1@18.225,29.502 ; v1@18.403,29.809 18.403,30.226 ; v1@18.682,29.263 v1@18.682,29.68 ; 19.127,29.465 19.127,29.882 ; 19.165,29.707 19.165,30.124 ; 19.482,29.441 19.482,29.858 ; 19.787,29.822 19.787,30.239 ; 20.054,29.517 v1@20.054,29.934 ; 20.385,29.493 v1@20.385,29.91 ; v1@20.422,29.758 v1@20.422,30.175 ; v1@20.74,29.656 v1@20.74,30.074 ; 20.854,29.402 v1@20.854,29.82
  other v1: 18.618,29.337 17.602,29.35 17.92,29.35 18.263,29.35 20.892,29.667 17.59,29.705 18.605,29.718 18.872,29.731 18.351,29.743 20.091,29.781 20.777,29.921 17.742,29.985 18.148,30.01 20.46,30.023
VOUT_A1: C5.2 C11.2 R1.2 U1.2 U1.5 U2.9 U2.13 U2.14 U2.27 U3.2 U3.5 U4.2 U4.5 | length 92.9
  Top Layer w0.2: v1(16.497,13.348) v1@16.51,13.36 ; U2.27 19.561,30.558 19.737,30.734 19.901,30.734 20.955,31.788 20.955,32.129 21.592,32.766 R1.2 ; U2.13 21.775,23.2 21.857,23.282 21.857,23.382 ; U2.14 21.74,23.6 21.857,23.483 21.857,23.382 ; v1(22.708,23.343) 22.668,23.382 21.857,23.382 ; C5.2@23.733,32.766 C5.2@23.938,32.561 ; v1@23.99,33.807 23.99,32.614 C5.2@24.055,32.548 ; C5.2 24.108,32.496 C5.2@24.282,32.322 ; v1(24.956,13.716) v1@24.987,13.748 ; U1.2@24.987,15.411 U1.2
  Top Layer w0.254: 16.51,16.637 17.92,16.637 18.136,16.853 18.136,18.059 19.113,19.037 19.113,20.248 19.155,20.289 19.155,20.463 19.161,20.469 U2.9
  Top Layer w0.4: v1@8.382,14.734 8.572,14.543 v1(8.572,14.516)
  Top Layer w0.6: v1@8.31,14.435 v1@8.501,14.235 ; v1@8.628,13.965 8.818,13.765 ; v1@8.717,14.74 v1@8.907,14.539 ; v1@8.818,14.244 v1@9.009,14.044 ; v1@9.034,14.333 v1@9.225,14.133
  Top Layer w1: v1@8.382,14.734 U4.2 U4.5 ; v1@16.51,13.36 U3.2 16.51,16.637 U3.5 ; v1@16.769,13.335 v1@16.769,14.27 ; R1.2 C5.2@23.733,32.766 ; v1@24.987,13.748 U1.2@24.987,15.411 ; 25.011,12.903 v1@25.011,13.838 ; U1.2 U1.5
  Bottom Layer w0.2: v1(19.202,20.511) 22.034,20.511 22.708,21.184 v1(22.708,23.343)
  Bottom Layer w1: 8.154,14.112 v1@8.154,14.529 ; 8.243,13.616 v1@8.243,14.034 ; v1(8.572,14.516) 9.741,13.348 v1(16.497,13.348) ; 8.675,13.299 8.675,13.716 ; v1@9.094,14.099 9.094,14.516 ; 9.096,13.114 9.096,13.531 ; 9.411,13.959 9.411,14.376 ; 10.186,13.578 10.186,13.995 ; 10.643,13.527 10.643,13.945 ; 11.113,13.388 11.113,13.805 ; 14.834,13.515 14.834,13.932 ; 15.456,13.629 15.456,14.046 ; 15.736,14.137 15.736,14.554 ; 16.13,13.693 16.13,14.11 ; v1@16.307,14.48 16.307,14.897 ; v1@16.497,13.271 24.511,13.271 v1(24.956,13.716) 24.956,33.35 v1(24.359,33.947) ; 16.612,14.785 16.612,15.202 ; v1@16.993,13.629 16.993,14.046 ; 16.993,14.226 16.993,14.643 ; 17.539,13.515 17.539,13.932 ; 18.035,13.273 18.035,13.691 ; v1@23.788,33.936 v1@23.788,34.353 ; 23.915,33.378 v1@23.915,33.795 ; v1(24.029,33.873) v1@24.029,34.392 ; 24.08,13.451 24.08,13.868 ; 24.461,32.717 24.461,33.134 ; v1@24.461,34.216 24.461,34.633 ; 24.473,13.007 24.473,13.424 ; 24.575,13.616 24.575,14.034 ; v1@24.651,14.302 24.651,14.719 ; 24.918,33.886 24.918,34.303 ; 25.07,12.956 v1@25.07,13.373 ; 25.324,15.09 25.324,15.507 ; 25.426,13.121 v1@25.426,13.538 ; 25.464,14.556 25.464,14.973 ; 25.578,13.756 25.578,14.173
  other v1: 25.108,13.221 24.917,13.386 16.866,13.437 25.197,13.538 16.65,13.64 16.396,13.703 25.235,13.805 16.764,13.881 8.484,13.983 8.7,14.008 8.928,14.046 24.93,14.059 9.144,14.135 16.396,14.11 25.248,14.11 8.42,14.237 16.637,14.211 8.661,14.313 8.903,14.313 25.121,14.351 24.841,14.364 16.408,14.453 8.826,14.541 16.751,14.529 8.28,14.567 24.892,14.618 25.133,14.63 23.952,33.642 24.27,33.642 23.736,33.807 24.066,34.138 23.825,34.201 24.371,34.29 24.105,34.392
pads on no net: P1.0 P1.MH1 P1.MH2 T2.0 USB1.0 USB1.A8 USB1.B8

## Polygon pours and split planes (outlines as drawn)
GND on Top Layer "NONET_L-01_P-001" (solid, shelved, pour order 1): 0.383,45.845 0.446,45.781 0.446,4.697 4.675,0.468 41.163,0.468 44.172,3.478 44.172,45.997 41.163,49.007 3.964,49.007 0.523,45.566 0.446,45.566
GND on Bottom Layer "NONET_L-01_P-001" (solid, shelved, pour order 0): 0.381,45.86 0.445,45.796 0.445,4.712 4.674,0.483 41.161,0.483 44.171,3.492 44.171,46.012 41.161,49.022 3.962,49.022 0.521,45.58 0.445,45.58

## Silkscreen, mask and mechanical layers (free items; w line width, h text height)
Top Overlay:
  text "VBUS_A2" at 16.026,2.927 h0.5
  text "VBUS_C" at 16.229,2.05 h0.5
  text "GND" at 16.978,1.306 h0.5
  text "VBUS_A1" at 16.077,0.463 h0.5
Bottom Overlay:
  text "B+" at 15.875,47.752 h2 r180
  text "B-" at 25.641,47.752 h2 r180
  text "ZCJ && JUJU" at 26.518,43.205 h1.5 r180
  text "2021.10.11" at 29.108,40.132 h1.5 r180
  text "hello,world!" at 27.495,36.114 h1.5 r180
  text "4.2V" at 33.694,31.054 h1.5 r180
  text "charge_module" at 25.057,26.729 h1.5 r180
Mechanical 1:
  the board outline again, w0.254